# Altium PCB TSAL.PcbDoc
Units mm, origin at the board's own origin, x right, y up, seen from the top; angles counter-clockwise.
Board outline 60 x 60 mm, 2 copper layers (Top Layer, Bottom Layer); 12 components, 18 nets, 51 pads, 0 vias.
Unrouted connection lines stored in the file: 2.
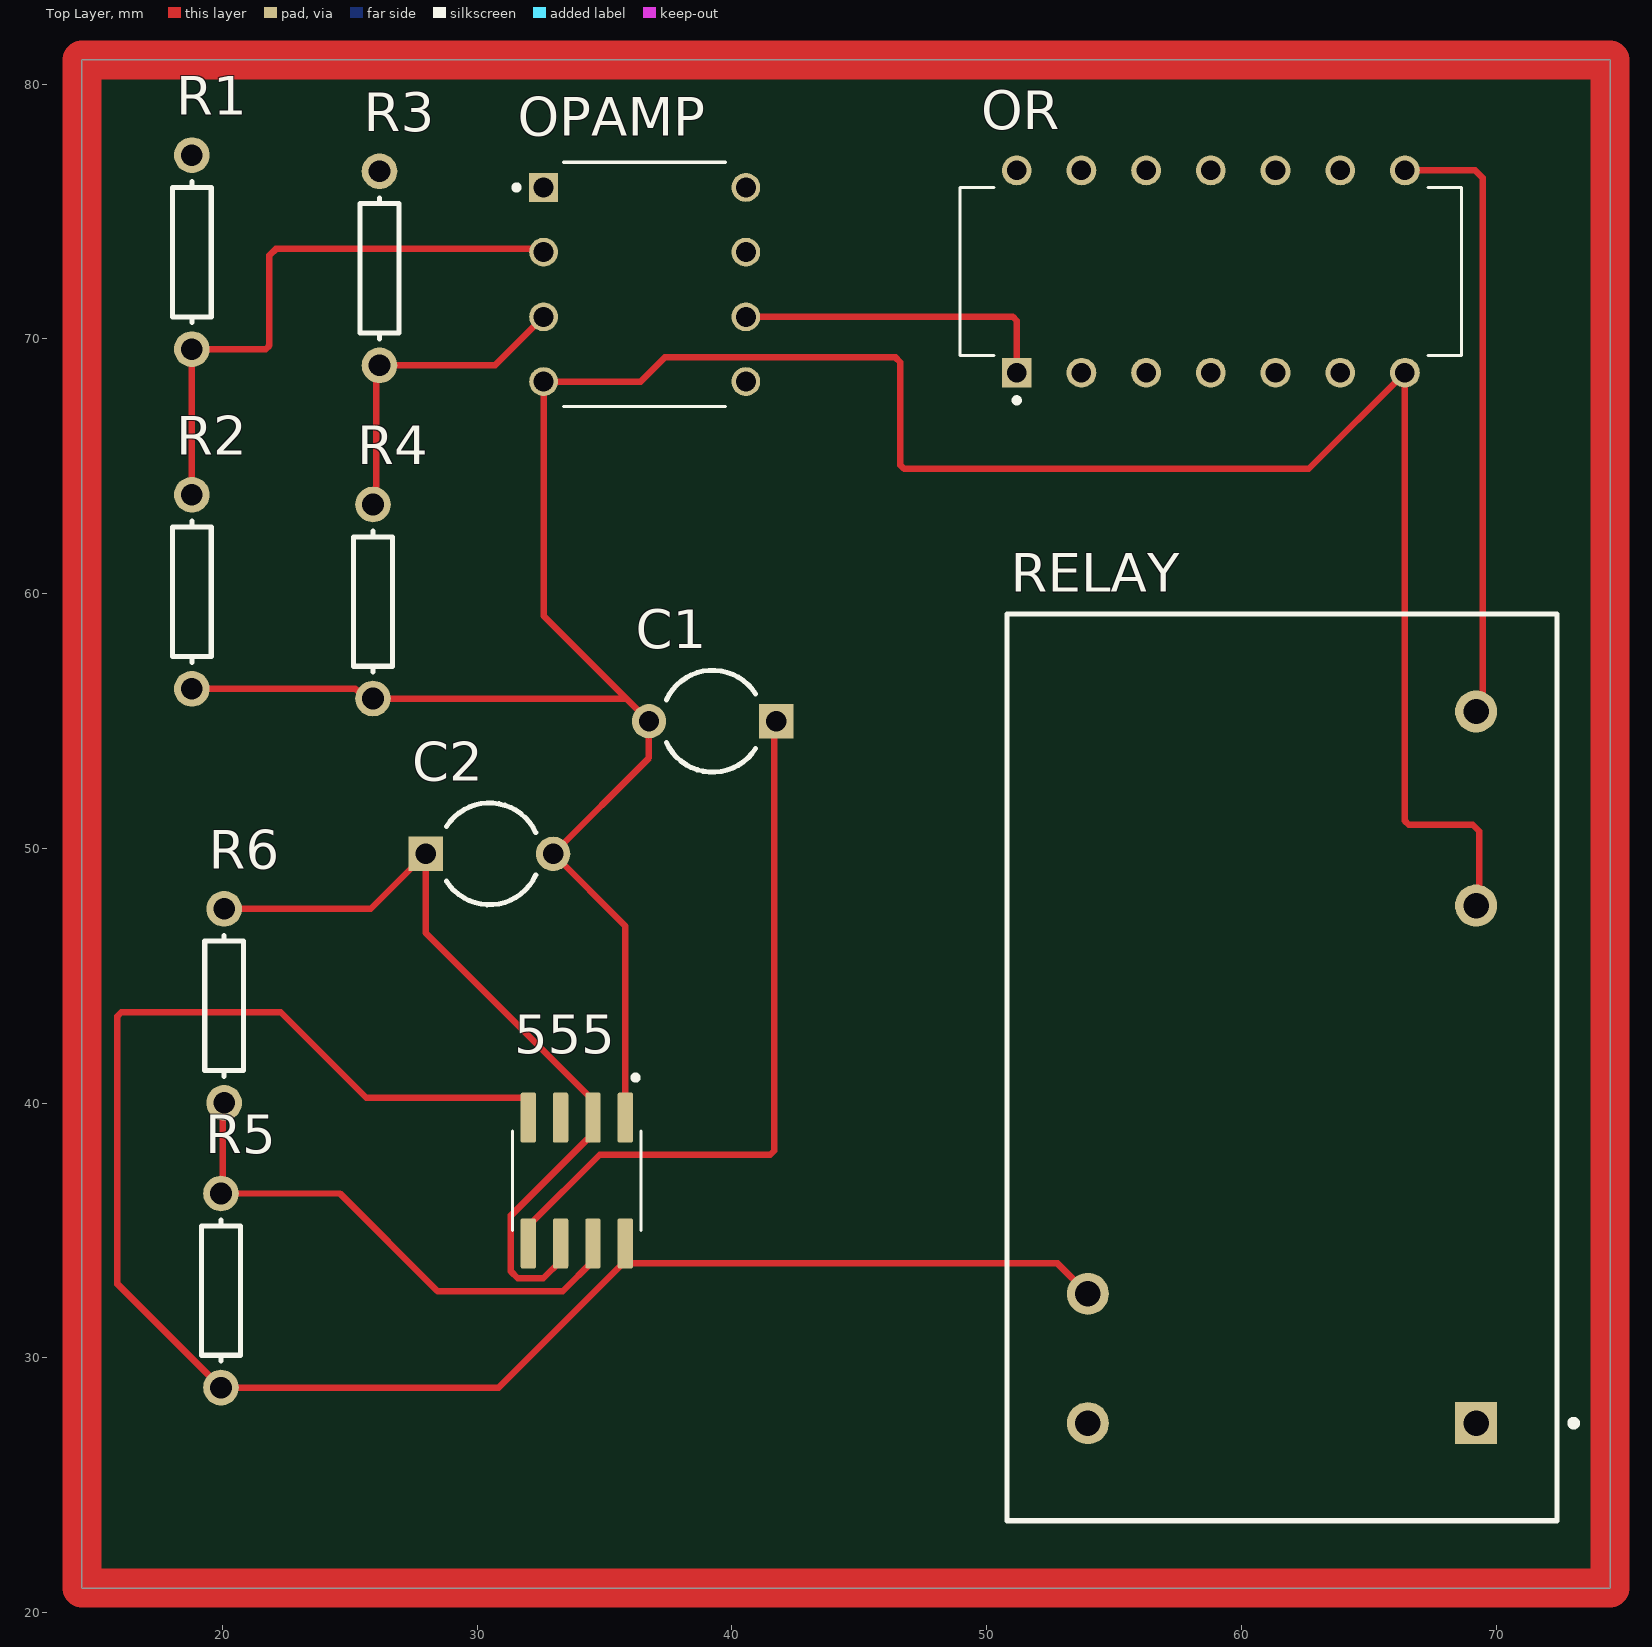
[diagram p0: Top Layer view]
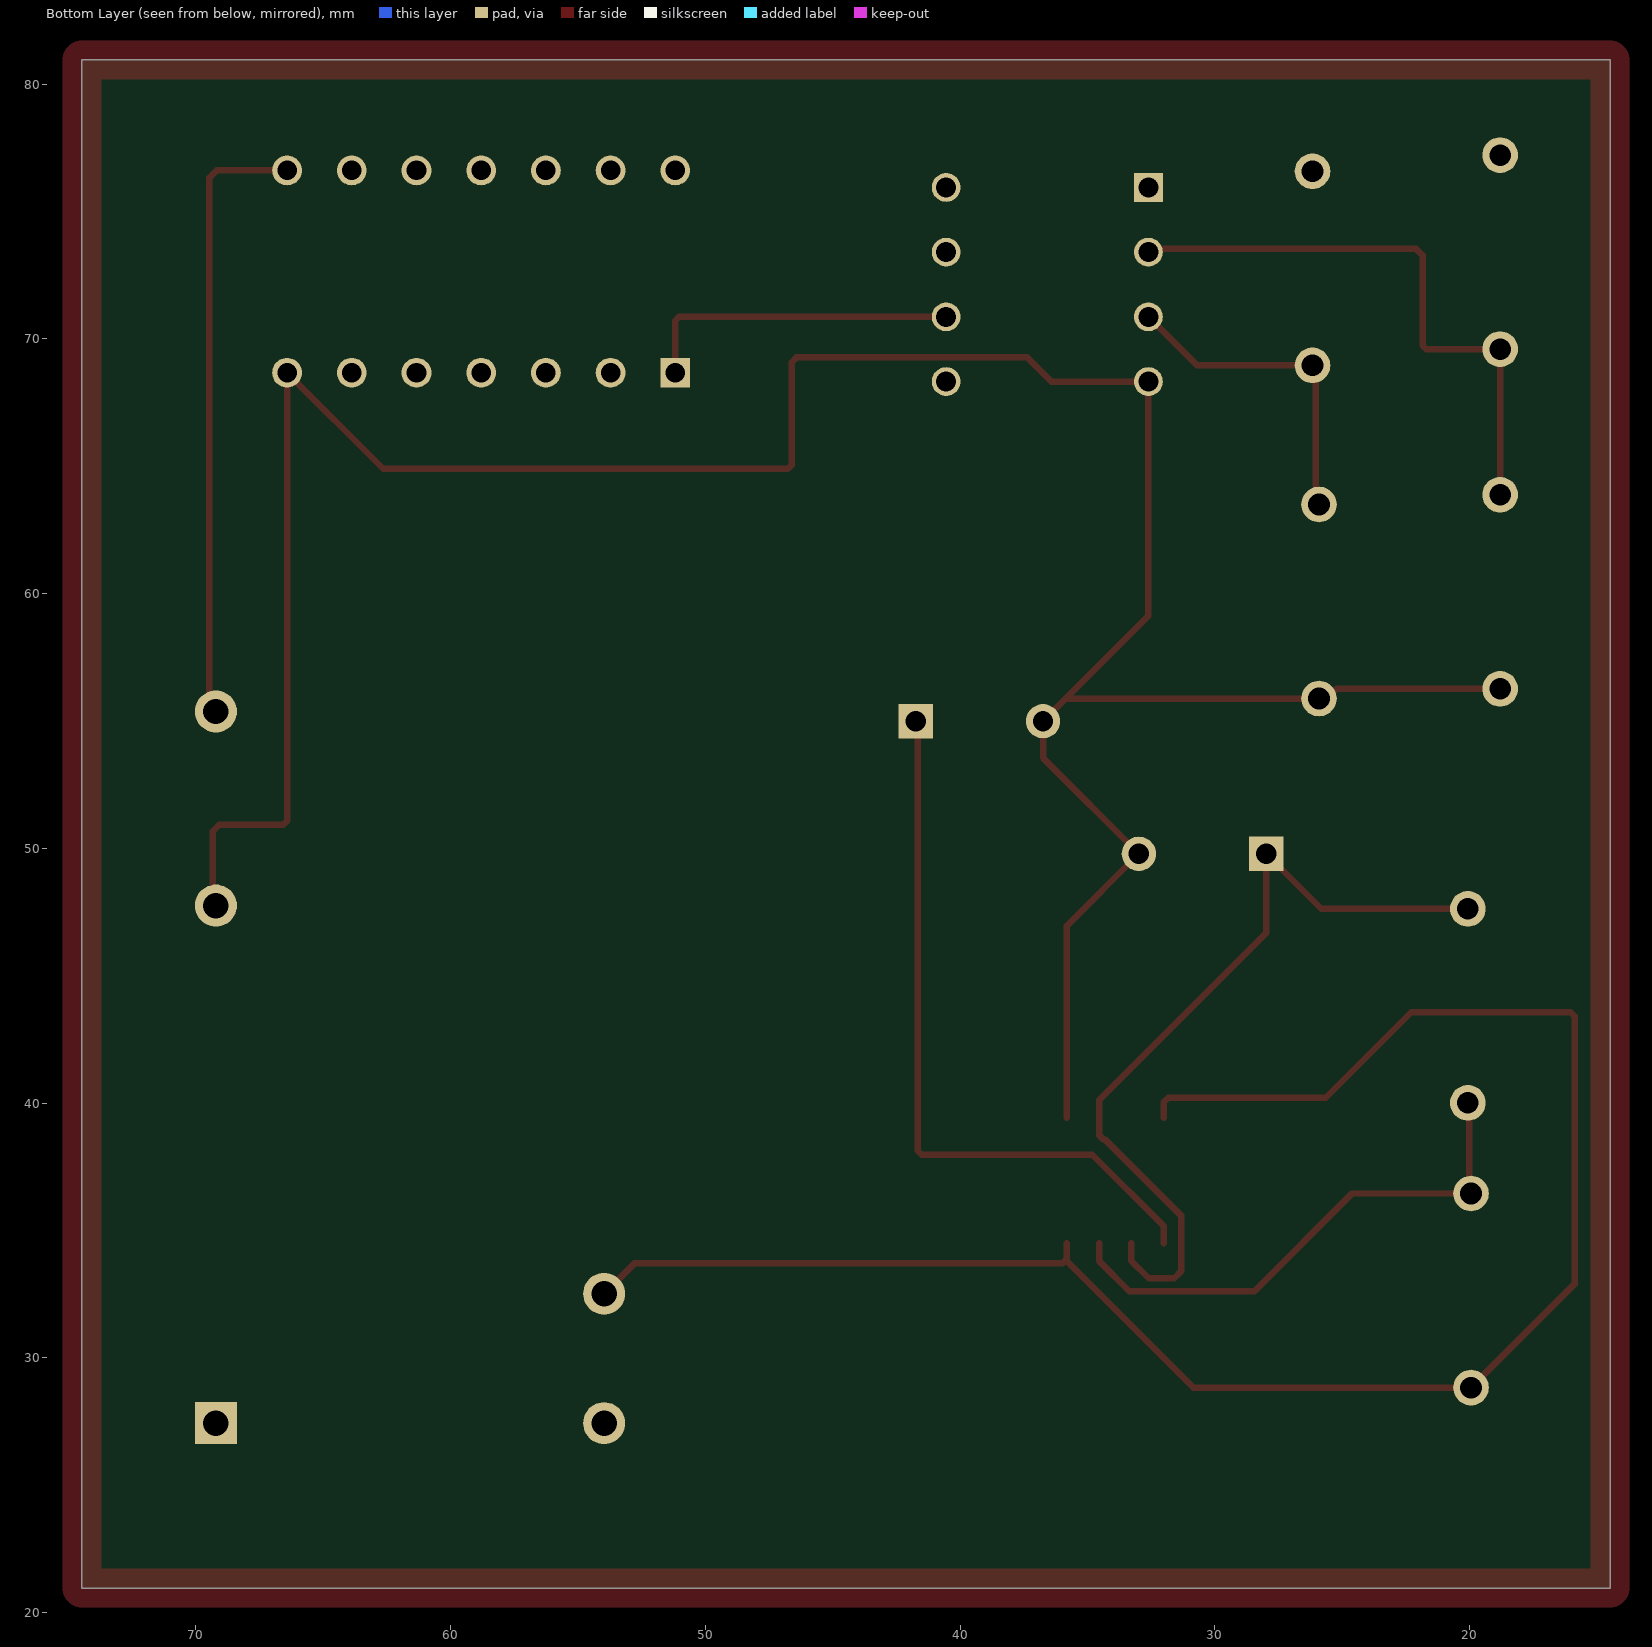
[diagram p1: Bottom Layer view, seen from below]

## Layer stack, top to bottom
Top Solder: solder mask 0.0102, Solder Resist, Dk 3.5
Top Layer: signal copper 0.0356
Dielectric 1: dielectric 0.32, FR-4, Dk 4.8
Bottom Layer: signal copper 0.0356
Bottom Solder: solder mask 0.0102, Solder Resist, Dk 3.5

## Board outline
14.478,20.955 14.478,80.955 74.478,80.955 74.478,20.955

## Design rules (kind name [scope] priority, off if disabled: settings)
Clearance [All] p1: gap=0.254 ignorepadtopadclearanceinfootprint=FALSE except(0: Arc-Hole Track-Hole SMDPad-Hole THPad-Hole Via-Hole Fill-Hole Poly-Hole Region-Hole Text-Hole)
PolygonConnect [All] p1: connectstyle=Relief reliefconductorwidth=0.254 reliefentries=4 polygonreliefangle="90 Angle" airgapwidth=0.254
RoomDefinition Sheet5 [InComponentClass('Sheet5')] p1: confinementstyle=ConfineIn formatcopy=TRUE lockcomponents=FALSE outline -25.527,-25.527 25.273,-25.527 25.273,-0.127 -25.527,-0.127
RoutingVias [All] p1: holewidth=0.711 width=1.27 viastyle="Through Hole" minholewidth=0.711 minwidth=1.27 maxholewidth=0.711 maxwidth=1.27
SolderMaskExpansion [All] p1: expansion=0.102 istentingtop=FALSE
Width [All] p1: maxlimit=0.254 minlimit=0.254 preferedwidth=0.254
30 further rules are at their usual default settings.

## Classes and differential pairs
component class Sheet5: 3 C1 C2 OPAMP OR R1 R2 R3 R4 R5 R6

## Components (designator, comment, footprint, x,y, rotation, side; value= is the part's Value field where it differs from the comment)
555 "LM555CM/NOPB" SOIC127P599X175-8N 33.909,36.957 r270 top
C1 "Cap2" CAPR5-4X5 39.243,54.991 r180 top value=0.01uF
C2 "Cap2" CAPR5-4X5 30.48,49.784 r0 top value=1uF
OPAMP "UA741CP" DIP794W45P254L959H508Q8 36.576,72.136 r0 top
OR "SN7432N" DIP794W45P254L1969H508Q14 58.801,72.644 r90 top
R1 "Res1" AXIAL-0.3 18.796,73.406 r270 top value=9K
R2 "Res1" AXIAL-0.3 18.796,60.071 r270 top value=1K
R3 "Res1" AXIAL-0.3 26.162,72.771 r270 top value=9K
R4 "Res1" AXIAL-0.3 25.908,59.69 r270 top value=1K
R5 "Res1" AXIAL-0.3 19.939,32.639 r90 top value=10K
R6 "Res1" AXIAL-0.3 20.066,43.815 r90 top value=724K
RELAY "Relay-SPDT" MODULE5B 61.595,41.402 r90 top

## Footprints (in the part's own frame and the unit in brackets; to place one, negate y for a bottom-side part, rotate by r counter-clockwise, add the part's x,y. Pads: shape width x height; smd on the part's side, far side on the other; paste and mask are expansions set on the pad)
AXIAL-0.3 [mm] "Axial Device, Thru-Hole; 2 Leads; 0.3 in Pin Spacing"
  round 1.4 hole 0.85: 1(-3.81,0) 2(3.81,0)
  silkscreen extent -2.77,-0.76 2.77,0.76
CAPR5-4X5 [mm] "Capacitor; 2 Leads"
  rect 1.35x1.35 hole 0.8: 1(-2.5,0)
  round 1.35 hole 0.8: 2(2.5,0)
  silkscreen extent -1.69,-2 1.82,2
DIP794W45P254L959H508Q8 [mm]
  rect 1.13x1.13 hole 0.78: 1(-3.97,3.81)
  round 1.13 hole 0.78: 2(-3.97,1.27) 3(-3.97,-1.27) 4(-3.97,-3.81) 5(3.97,-3.81) 6(3.97,-1.27) 7(3.97,1.27) 8(3.97,3.81)
  silkscreen extent -5.13,-4.79 3.17,4.79
DIP794W45P254L1969H508Q14 [mm]
  rect 1.17x1.17 hole 0.77: 1(-3.97,7.62)
  round 1.17 hole 0.77: 2(-3.97,5.08) 3(-3.97,2.54) 4(-3.97,0) 5(-3.97,-2.54) 6(-3.97,-5.08) 7(-3.97,-7.62) 8(3.97,-7.62) 9(3.97,-5.08) 10(3.97,-2.54) 11(3.97,0) 12(3.97,2.54) 13(3.97,5.08) 14(3.97,7.62)
  silkscreen extent -5.15,-9.84 3.3,9.84, body extent -9.65,-5.46 9.65,5.46, height 5.08
MODULE5B [mm] "DIP; 5 Round Pins; Row Space 15.24 mm; Pitch 2.54 mm"
  rect 1.65x1.65 hole 1: 1(-13.97,-7.62)
  round 1.65 hole 1: 2(-13.97,7.62) 3(-8.89,7.62) 4(13.97,-7.62) 5(6.35,-7.62)
  silkscreen extent -17.8,-11.58 17.8,10.8, body extent -17.8,-10.8 17.8,10.8, height 14
SOIC127P599X175-8N [mm]
  rrect25% 1.97x0.6 smd: 1(-2.47,1.905) 2(-2.47,0.635) 3(-2.47,-0.635) 4(-2.47,-1.905) 5(2.47,-1.905) 6(2.47,-0.635) 7(2.47,0.635) 8(2.47,1.905)
  silkscreen extent -4.14,-2.52 1.95,2.52

## Part data
555: "Highly Stable 555 Timer 8-SOIC 0 to 70", Package="SOIC-8 Texas Instruments", Arrow_Asia-Purchase-URL=https://snapeda.com/shop?store=Arrow+Asia&id=50124, Availability=Good, DigiKey-Purchase-URL=https://snapeda.com/shop?store=DigiKey&id=50124, MF="Texas Instruments", Mouser-Purchase-URL=https://snapeda.com/shop?store=Mouser&id=50124, MP=LM555CM/NOPB, Price=None, SnapEDA_Link=https://www.snapeda.com/parts/LM555CM/NOPB/Texas%20Instruments/view-part/50124/?ref=snap, Texas_Instruments-Purchase-URL=https://snapeda.com/shop?store=Texas+Instruments&id=50124
C1 C2: "Capacitor", PackageDescription="Capacitor; 2 Leads", PackageReference=CAPR5-4X5, Published=23-Sep-2002, Publisher="Altium Limited"
OPAMP: "General-Purpose Operational Amplifier", Package="PDIP-8 Texas Instruments", Availability=Unavailable, MF="Texas Instruments", MP=UA741CP, Price=None, SnapEDA_Link=https://www.snapeda.com/parts/UA741CP/Texas%20Instruments/view-part/50768/?ref=snap, Texas_Instruments-Purchase-URL=https://snapeda.com/shop?store=Texas+Instruments&id=50768
OR: "Quad 2-input positive-OR gates 14-PDIP 0 to 70", Package="PDIP-14 Texas Instruments", Availability=Good, Check_prices=https://www.snapeda.com/parts/SN7432N/Texas%20Instruments/view-part/390128/?ref=eda, MF="Texas Instruments", MP=SN7432N, Price=None, Purchase-URL=https://pricing.snapeda.com/search/part/SN7432N/?ref=eda, SnapEDA_Link=https://www.snapeda.com/parts/SN7432N/Texas%20Instruments/view-part/390128/?ref=snap
R1 R2 R3 R4 R5 R6: "Resistor", LatestRevisionDate=17-Jul-2002, LatestRevisionNote="Re-released for DXP Platform.", PackageDescription="Axial Device, Thru-Hole; 2 Leads; 0.3 in Pin Spacing", PackageReference=AXIAL-0.3, Published=8-Jun-2000, Publisher="Altium Limited"
RELAY: "Single-Pole Dual-Throw Relay", LatestRevisionDate=17-Jul-2002, LatestRevisionNote="Re-released for DXP Platform.", PackageReference=MODULE5B, Published=24-Mar-1999, Publisher="Altium Limited"

## Nets (pads, with @x,y where several pads share a name; then routed paths per layer and width w, separated by ;. In a path a pad name is that pad's centre, name@x,y a point inside that pad or via, vN(x,y) a via of type N, cw(c..) or ccw(c..) an arc to the next point about the centre after c; other vN are vias at no path point)
60V: R1.1
+12: OPAMP.7
GND: 555.1 C1.2 C2.2 OPAMP.4 OR.7 R2.2 R4.2 RELAY.5 | length 114.2
  Top Layer w0.254: R2.2 25.217,56.261 25.598,55.88 R4.2 35.854,55.88 ; 555.1 35.814,46.95 C2.2 36.743,53.547 C1.2 35.854,55.88 ; RELAY.5 69.342,47.879 69.342,50.673 69.088,50.927 66.57,50.927 66.421,51.076 OR.7 62.644,64.897 46.758,64.897 46.609,65.046 46.609,69.088 46.425,69.272 37.363,69.272 36.417,68.326 OPAMP.4 32.606,59.128 35.854,55.88
HV: R3.1
Net555_2: 555.2 555.6 C2.1 R6.2 | length 32.3
  Top Layer w0.254: R6.2 25.821,47.625 C2.1 27.98,46.676 34.544,40.112 555.2 34.544,38.742 34.371,38.569 34.306,38.569 31.323,35.586 31.323,33.388 31.59,33.121 32.593,33.121 33.274,33.802 555.6
Net555_4: 555.4 555.8 R5.1 RELAY.3 | length 71.9
  Top Layer w0.254: 555.4 32.004,40.037 31.831,40.21 25.64,40.21 22.289,43.561 16.024,43.561 15.875,43.412 15.875,32.893 R5.1 30.841,28.829 35.814,33.802 555.8@35.814,33.877 ; 555.8 555.8@35.814,33.877 ; RELAY.3 52.783,33.704 35.987,33.704 555.8@35.814,33.877
Net555_5: 555.5 C1.1 | length 28.5
  Top Layer w0.254: 555.5 32.004,35.172 34.805,37.973 41.507,37.973 41.656,38.122 41.656,54.904 C1.1
Net555_7: 555.7 R5.2 R6.1 | length 21
  Top Layer w0.254: R6.1 20.002,39.941 20.002,36.512 R5.2 24.608,36.449 28.444,32.613 33.355,32.613 34.544,33.802 555.7
NetOPAMP_2: OPAMP.2 R1.2 R2.1 | length 23.3
  Top Layer w0.254: R2.1 R1.2 21.695,69.596 21.844,69.745 21.844,73.279 22.098,73.533 32.479,73.533 OPAMP.2
NetOPAMP_3: OPAMP.3 R3.2 R4.1 | length 12.8
  Top Layer w0.254: R4.1 26.035,63.627 26.035,68.834 R3.2 30.701,68.961 OPAMP.3
NetOPAMP_6: OPAMP.6 OR.1 | length 12.7
  Top Layer w0.254: OPAMP.6 51.032,70.866 51.181,70.717 OR.1
NetOR_3: OR.3 OR.4
NetOR_6: OR.6 OR.9
NetOR_8: OR.8 RELAY.4 | length 24.2
  Top Layer w0.254: OR.8 69.182,76.614 69.469,76.327 69.469,55.626 RELAY.4
V1: OR.2
V2: OR.5
V3: OR.10
VCC: OR.14
pads on no net: 555.3 OPAMP.1 OPAMP.5 OPAMP.8 OR.11 OR.12 OR.13 RELAY.1 RELAY.2
copper on no net: | length 240
  Top Layer w1.524: 14.478,20.955 14.478,80.955 74.478,80.955 74.478,20.955 14.478,20.955